# EAGLE board inductor_test_1v0 (EAGLE 6.5.0)
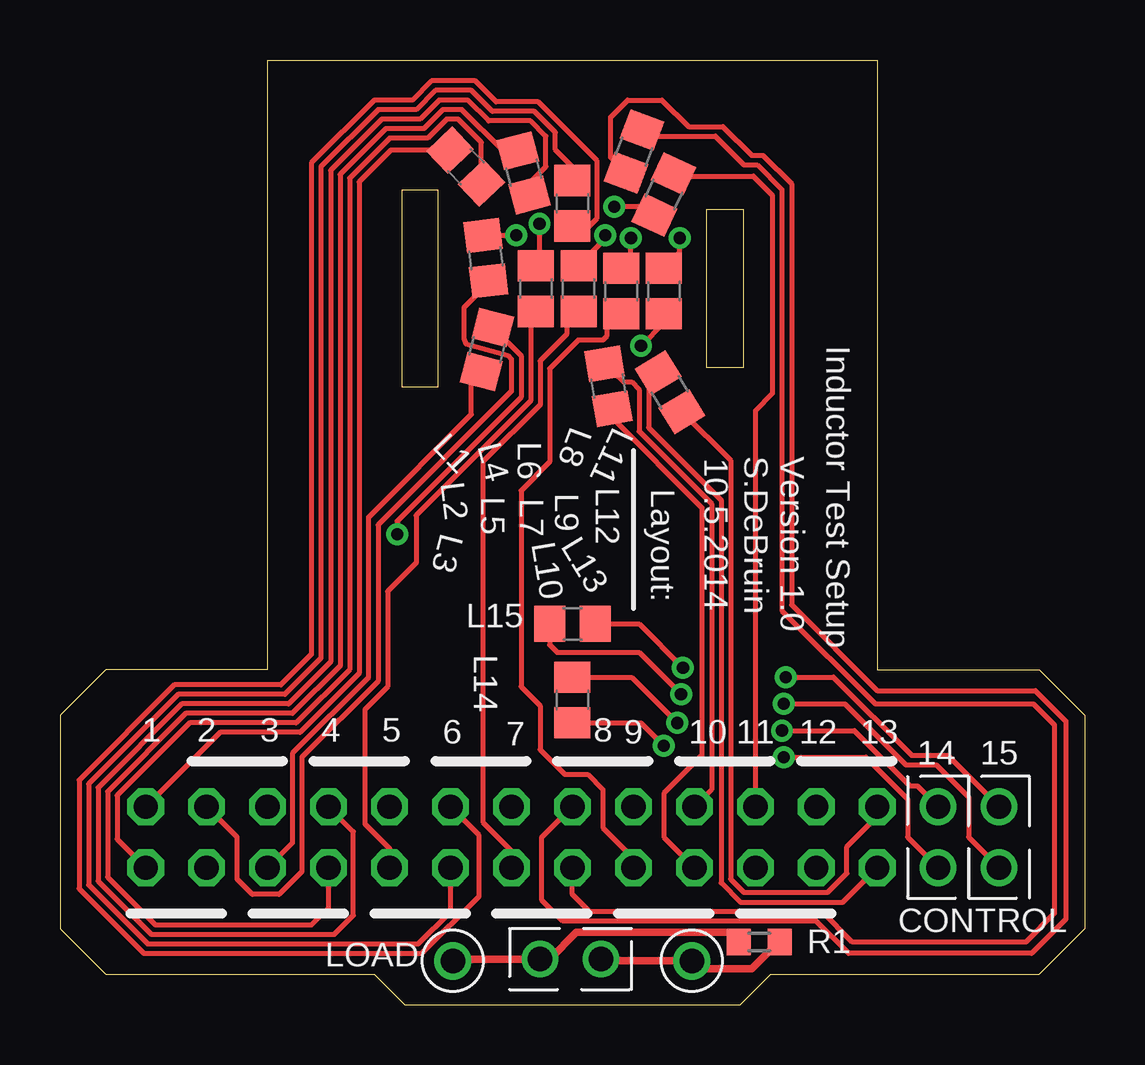
[diagram p0: board, top side]
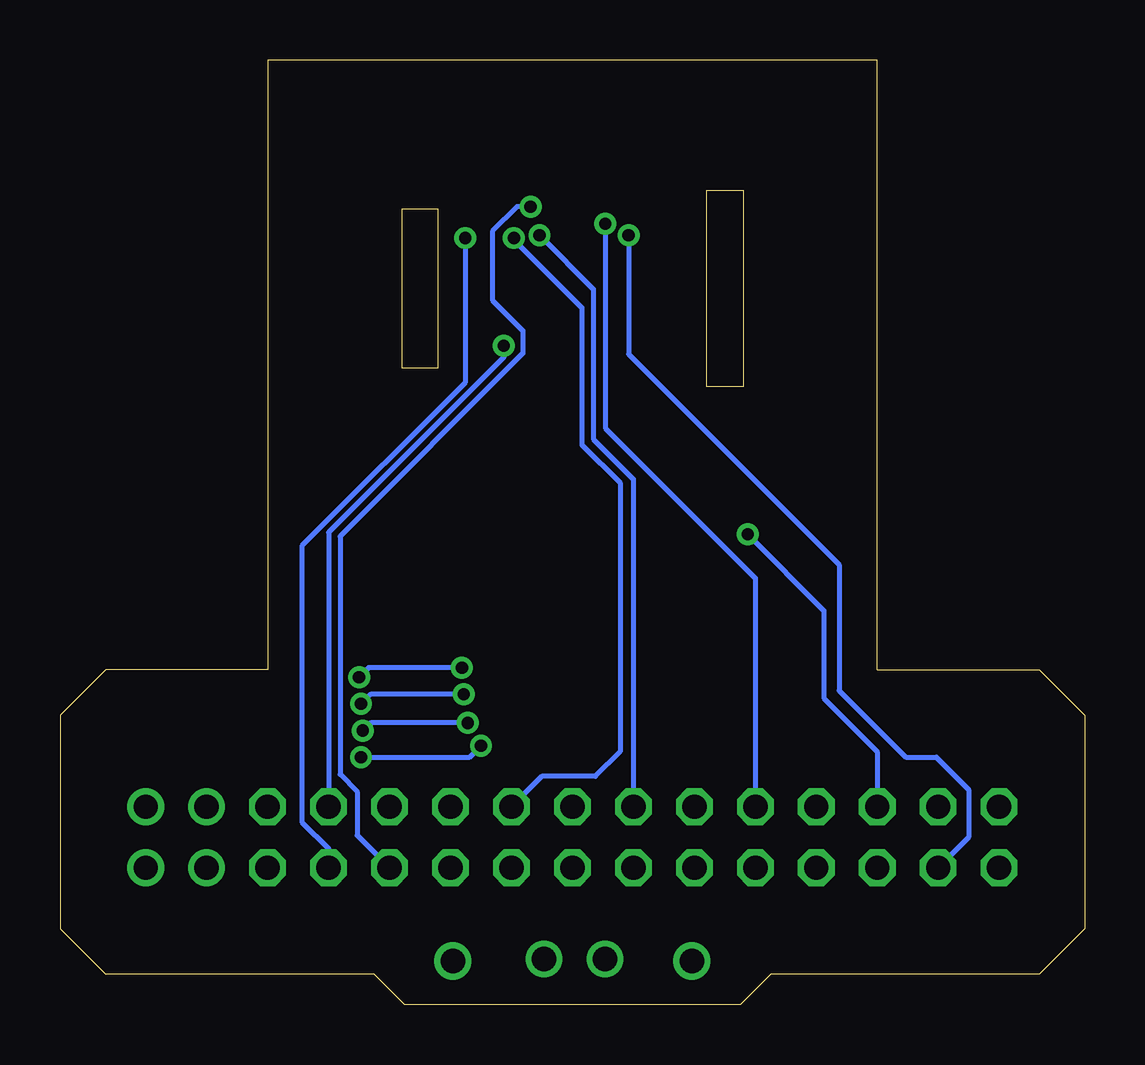
[diagram p1: board, bottom side, seen from below]

Size 42.7 x 39.37 mm. Coordinates in mm from the lower left corner, seen from the top.
Outline: 8.65,13.97 1.9,13.97 0,12.06 0,3.17 1.9,1.27 13.1,1.27 14.37,0 28.34,0 29.61,1.27 40.8,1.27 42.7,3.17 42.7,12.06 40.8,13.97 34.05,13.97
Copper layers (1*16): Top 0.0178mm / dielectric 59mil / Bottom 0.0178mm
Design rules "SSC-EAGLE-2Lyr_v1.0.0.3": minimum track width 6mil, minimum drill 14mil, track to track 6mil, track to pad 6mil, pad to pad 6mil, via to via 6mil, smd to smd 6mil, copper to edge 20mil, drill to drill 16mil, minimum pad ring 8mil, minimum via ring 8mil, stop-mask expansion 3mil, vias tented up to drill 0mil, thermal gap 10mil

## Footprints (pad centres in the part's own frame; a part is rotated, then mirrored left to right if it is on the bottom)
MA02-1_ROUND = drill 1.016: 1 -1.27,0; 2 1.27,0
L0805 = smd 1.3 x 1.5: 1 -0.95,0; 2 0.95,0
R0603 = smd 1 x 1.1: 1 -0.85,0; 2 0.85,0
MA13-2_BARE = drill 1.016 octagon: 1 -15.24,-1.27; 2 -15.24,1.27; 3 -12.7,-1.27; 4 -12.7,1.27; 5 -10.16,-1.27; 6 -10.16,1.27; 7 -7.62,-1.27; 8 -7.62,1.27; 9 -5.08,-1.27; 10 -5.08,1.27; 11 -2.54,-1.27; 12 -2.54,1.27; 13 0,-1.27; 14 0,1.27; 15 2.54,-1.27; 16 2.54,1.27; 17 5.08,-1.27; 18 5.08,1.27; 19 7.62,-1.27; 20 7.62,1.27; 21 10.16,-1.27; 22 10.16,1.27; 23 12.7,-1.27; 24 12.7,1.27; 25 15.24,-1.27; 26 15.24,1.27
TP = drill 1.029: P$1 0,0

## Placement (x,y rotation side)
J1  MA02-1_ROUND  [MA02-1_ROUND]  21.27,1.9 0 top
L1  [L0805]  16.91,34.92 313.4 top
L2  [L0805]  17.75,31.11 277.1 top
L3  [L0805]  17.8,27.3 255.3 top
L4  [L0805]  19.32,34.67 284.9 top
L5  [L0805]  19.83,29.84 270 top
L6  [L0805]  21.35,33.4 270 top
L7  [L0805]  21.61,29.84 270 top
L8  [L0805]  23.92,35.56 249.5 top
L9  [L0805]  23.38,29.74 270 top
L10  [L0805]  22.85,25.78 99.6 top
L11  [L0805]  25.16,33.77 245.1 top
L12  [L0805]  25.16,29.74 270 top
L13  [L0805]  25.42,25.53 121.3 top
L14  [L0805]  21.35,12.7 90 top
L15  [L0805]  21.35,15.87 0 top
R1  [R0603]  29.13,2.62 180 top
SV1  [MA13-2_BARE]  18.81,6.98 180 top
SV2  MA02-1_ROUND  [MA02-1_ROUND]  36.59,6.98 90 top
SV3  MA02-1_ROUND  [MA02-1_ROUND]  39.13,6.98 270 top
TP1  TP_STD  [TP]  26.33,1.83 0 top
TP2  TP_STD  [TP]  16.37,1.83 0 top
U$1  [NEMA_1-15_TIGHT]  21.35,29.84 0 top

## Library data of the parts
J1 SV2 SV3 = con-lstb; DIGIKEY: NP
L1-L15 = rcl
R1 = rcl; DIGIKEY: P49.9HCT-ND; DIGIKEY_2: P220JCT-ND
SV1 = con-lstb; DIGIKEY: 3M9464-ND
TP1 TP2 = skyspecs; DIGIKEY: NP
U$1 = powerfilm

## Nets
C1P1: L14.1 SV2.1
C1P2: L14.2 SV2.2
C2P1: L15.1 SV3.2
C2P2: L15.2 SV3.1
L1P1: L1.1 SV1.25
L1P2: L1.2 SV1.26
L2P1: L2.1 SV1.24
L2P2: L2.2 SV1.23
L3P1: L3.1 SV1.21
L3P2: L3.2 SV1.22
L4P1: L4.1 SV1.20
L4P2: L4.2 SV1.19
L5P1: L5.1 SV1.17
L5P2: L5.2 SV1.18
L6P1: L6.1 SV1.16
L6P2: L6.2 SV1.15
L7P1: L7.1 SV1.13
L7P2: L7.2 SV1.14
L8P1: L8.1 SV1.12
L8P2: L8.2 SV1.11
L9P1: L9.1 SV1.9
L9P2: L9.2 SV1.10
L10P1: L10.1 SV1.8
L10P2: L10.2 SV1.7
L11P1: L11.1 SV1.5
L11P2: L11.2 SV1.6
L12P1: L12.1 SV1.4
L12P2: L12.2 SV1.3
L13P1: L13.1 SV1.1
L13P2: L13.2 SV1.2
N$1: J1.2 R1.1 TP1.P$1
N$2: J1.1 R1.2 TP2.P$1

## Tracks (layer width: path | path; a pad name or v marks a point on that pad's centre or on a via)
C1P1  (via drill 0.51)
  Top 0.203: L14.1 24.21,11.75 v25.16,10.79 | v30.16,10.32 33.58,10.32 35.32,8.57 35.32,6.98 SV2.1
  Bottom 0.203: v30.16,10.32 25.64,10.32 v25.16,10.79
C1P2  (via drill 0.51)
  Top 0.203: L14.2 23.81,13.65 v25.72,11.75 | v30.08,11.43 33.1,11.43 35.4,9.13 35.72,9.13 SV2.2
  Bottom 0.203: v25.72,11.75 29.77,11.75 v30.08,11.43
C2P1  (via drill 0.51)
  Top 0.203: L15.1 20.4,15 20.72,14.68 24.13,14.68 v25.88,12.94 | v30.16,12.54 32.7,12.54 35.24,10 36.51,10 37.86,8.65 37.86,6.98 SV3.2
  Bottom 0.203: v25.88,12.94 29.77,12.94 v30.16,12.54
C2P2  (via drill 0.51)
  Top 0.203: L15.2 24.13,15.87 v25.96,14.05 | v30.24,13.65 32.23,13.65 35.48,10.4 36.99,10.4 SV3.1
  Bottom 0.203: v25.96,14.05 29.84,14.05 v30.24,13.65
L1P1
  Top 0.203: L1.1 13.79,35.61 12.46,34.29 12.46,13.81 10,11.35 6.67,11.35 SV1.25
L1P2
  Top 0.203: L1.2 17.56,35.94 16.59,36.91 16.11,36.91 15.32,36.12 13.73,36.12 12.06,34.45 12.06,13.97 9.84,11.75 5.4,11.75 2.38,8.73 2.38,6.91 SV1.26
L2P1  (via drill 0.51)
  Top 0.203: L2.1 17.64,32.07 v19.01,32.07
  Bottom 0.203: v19.01,32.07 19.01,27.11 10.24,18.34 10.24,13.1 7.46,10.32 6.19,10.32 4.84,8.97 4.84,6.98 SV1.24
L2P2
  Top 0.203: L2.2 17.91,30.14 16.83,29.05 16.83,27.78 16.91,27.54 18.65,27.07 18.81,26.91 18.81,25.56 13.26,20 13.26,13.49 10.08,10.32 10.08,5.56 9.13,4.6 8.02,4.6 7.38,5.24 7.38,6.98 SV1.23
L3P1  (via drill 0.51)
  Top 0.203: L3.1 19.21,27.05 19.21,25.32 14.05,20.16 v14.05,19.61
  Bottom 0.203: v14.05,19.61 10.87,16.43 10.87,12.78 8.65,10.56 SV1.21
L3P2
  Top 0.203: L3.2 17.14,25.98 17.14,24.61 12.86,20.32 12.86,13.65 9.68,10.48 9.68,6.75 SV1.22
L4P1
  Top 0.203: L4.1 18.46,35.59 16.75,37.31 15.95,37.31 15.16,36.51 13.57,36.51 11.67,34.61 11.67,14.13 9.68,12.14 5.24,12.14 1.98,8.89 1.98,5.32 3.97,3.33 10.48,3.33 11.19,4.05 SV1.20
L4P2
  Top 0.203: L4.2 19.56,34.25 20.24,34.92 20.24,36.2 19.61,36.83 17.86,36.83 16.99,37.7 15.8,37.7 15,36.91 13.41,36.91 11.27,34.77 11.27,14.29 9.52,12.54 5.08,12.54 1.59,9.05 1.59,5.16 3.81,2.94 11.43,2.94 12.22,3.73 12.22,7.22 SV1.19
L5P1  (via drill 0.51)
  Top 0.203: L5.1 19.98,30.95 v19.98,32.54
  Bottom 0.203: v19.98,32.54 19.98,24.03 13.73,17.78 SV1.17
L5P2
  Top 0.203: L5.2 19.61,28.67 19.61,25.16 14.84,20.4 14.84,18.41 13.65,17.22 13.65,13.26 12.7,12.3 12.7,7.54 13.73,6.51 SV1.18
L6P1
  Top 0.203: L6.1 21.35,34.92 20.64,35.64 20.64,36.35 19.76,37.23 18.02,37.23 17.14,38.1 15.64,38.1 14.84,37.31 13.26,37.31 10.87,34.92 10.87,14.45 9.37,12.94 4.92,12.94 1.19,9.21 1.19,5 3.65,2.54 14.92,2.54 16.27,3.89 SV1.16
L6P2
  Top 0.203: L6.2 22.05,32.45 22.38,32.78 22.38,35.16 19.92,37.62 18.18,37.62 17.3,38.5 15.48,38.5 14.68,37.7 13.1,37.7 10.48,35.08 10.48,14.6 9.21,13.33 4.76,13.33 0.79,9.37 0.79,4.84 3.49,2.14 15.08,2.14 17.46,4.52 17.46,7.06 SV1.15
L7P1  (via drill 0.51)
  Top 0.203: L7.1 22.72,31.91 v22.72,32.07
  Bottom 0.203: v22.72,32.07 20.48,29.82 20.48,23.57 18.81,21.91 SV1.13
L7P2
  Top 0.203: L7.2 21.11,28.4 21.11,27.94 20,26.83 20,25 17.62,22.62 17.62,7.62 18.81,6.43 SV1.14
L8P1
  Top 0.203: L8.1 24.5,36.2 27.3,36.2 28.5,35 29.05,35 30.08,33.97 30.08,16.43 33.97,12.54 40.56,12.54 41.43,11.67 41.43,3.81 40.24,2.62 33.02,2.62 31.75,3.89 22.07,3.89 21.35,4.6 SV1.12
L8P2
  Top 0.203: L8.2 22.94,35.31 22.94,36.99 23.65,37.7 25.08,37.7 26.19,36.59 27.62,36.59 28.81,35.4 29.29,35.4 30.48,34.21 30.48,16.67 34.05,13.1 40.64,13.1 41.91,11.83 41.91,3.57 40.48,2.14 32.86,2.14 31.51,3.49 20.95,3.49 20.08,4.37 20.08,6.98 SV1.11
L9P1  (via drill 0.51)
  Top 0.203: L9.1 23.79,31.1 v23.79,31.95
  Bottom 0.203: v23.79,31.95 23.79,31.89 20.95,29.05 20.95,23.34 19.37,21.75 19.37,10.56 20.4,9.52 22.62,9.52 SV1.9
L9P2
  Top 0.203: L9.2 22.78,28.19 22.78,27.86 22.62,27.7 21.59,27.7 20.4,26.51 20.4,22.62 19.21,21.43 19.21,13.26 20,12.46 20,10.64 21.03,9.6 21.99,9.6 22.62,8.97 22.62,7.38 23.89,6.11 SV1.10
L10P1
  Top 0.203: L10.1 23.01,24.46 26.75,20.72 26.75,10.4 25.16,8.81 25.16,6.98 SV1.8
L10P2
  Top 0.203: L10.2 23.48,25.96 23.81,25.96 24.13,25.64 24.13,23.89 27.15,20.88 27.15,8.97 SV1.7
L11P1
  Top 0.203: L11.1 25.65,34.53 28.89,34.53 29.69,33.73 29.69,25.48 28.97,24.77 SV1.5
L11P2  (via drill 0.51)
  Top 0.203: L11.2 24.41,33.26 v23.1,33.26
  Bottom 0.203: v23.1,33.26 23.65,33.26 24.69,32.23 24.69,29.37 23.42,28.1 23.42,27.15 31.04,19.53 31.04,9.6 30.32,8.89 30.32,7.06 SV1.6
L12P1  (via drill 0.51)
  Top 0.203: L12.1 25.82,31.35 v25.82,31.95
  Bottom 0.203: v25.82,31.95 25.82,25.93 32.62,19.13 32.62,7.62 31.51,6.51 SV1.4
L12P2  (via drill 0.51)
  Top 0.203: L12.2 25.16,28.42 v24.21,27.46
  Bottom 0.203: v24.21,27.46 24.21,26.99 31.51,19.68 SV1.3
L13P1
  Top 0.203: L13.1 27.94,22.68 27.94,5.24 28.5,4.68 31.99,4.68 32.78,5.48 32.78,6.59 34.05,7.86 SV1.1
L13P2
  Top 0.203: L13.2 24.53,25.94 24.53,24.05 27.54,21.03 27.54,5.08 28.34,4.29 32.62,4.29 SV1.2
N$1
  Top 0.203: J1.2 22.62,1.83 | 29.98,2.68 R1.1
  Top 0.305: 22.62,1.83 TP1.P$1 26.65,1.51 28.81,1.51 29.98,2.68
N$2
  Top 0.203: R1.2 27.8,3.02 | TP2.P$1 16.45,1.9
  Top 0.305: 27.8,3.02 21.51,3.02 20.4,1.9 J1.1 16.45,1.9

## Text on the board
tPlace: Inductor Test Setup | 10.5.2014 | S.DeBruin | Version 1.0 | Layout: | 1 | 2 | 3 | 4 | 5 | 6 | 7 | 8 | 9 | 10 | 11 | 12 | 13 | 14 | 15 | CONTROL | LOAD